# Allegro board POWER_BOARD_03AUG15_2330.brd
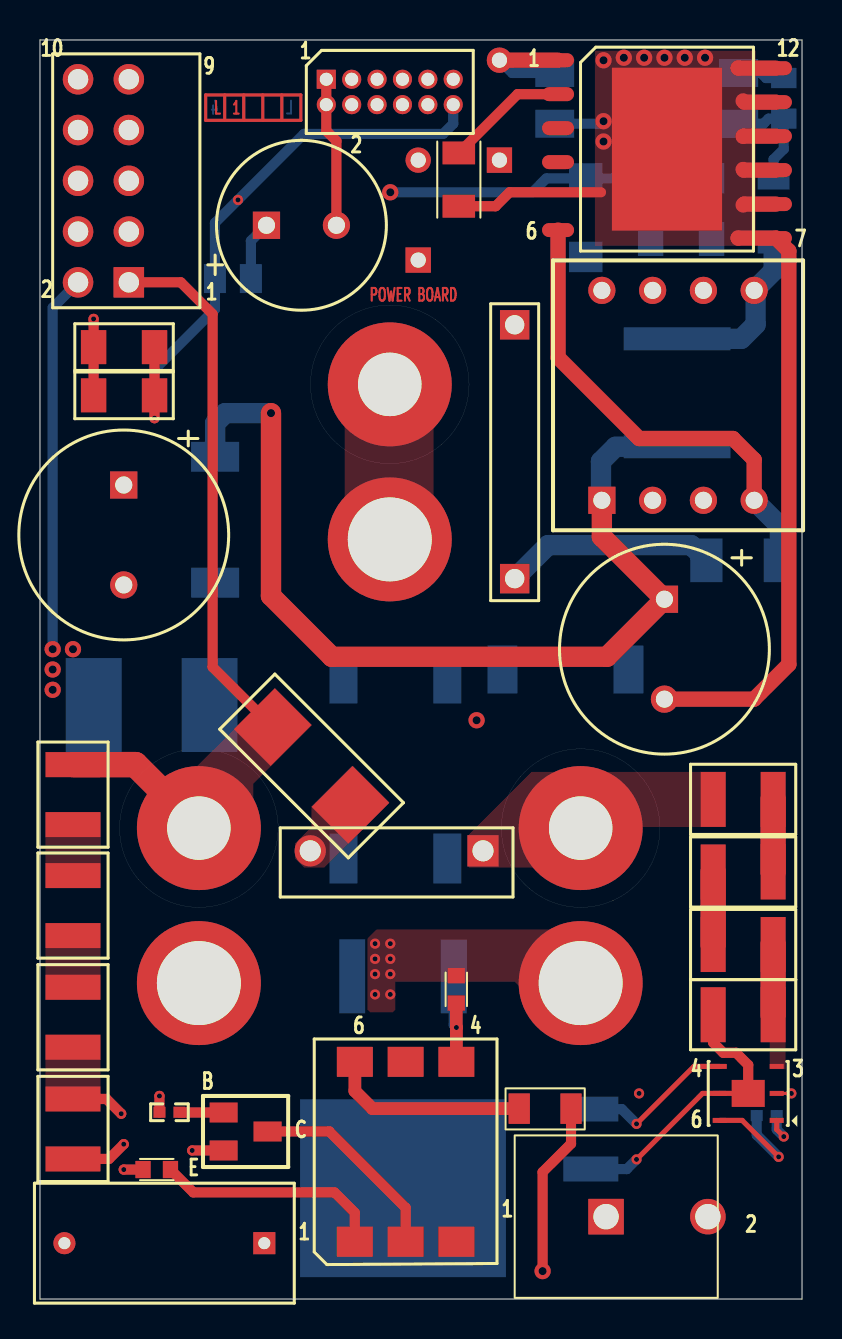
[diagram p0: board, top side]
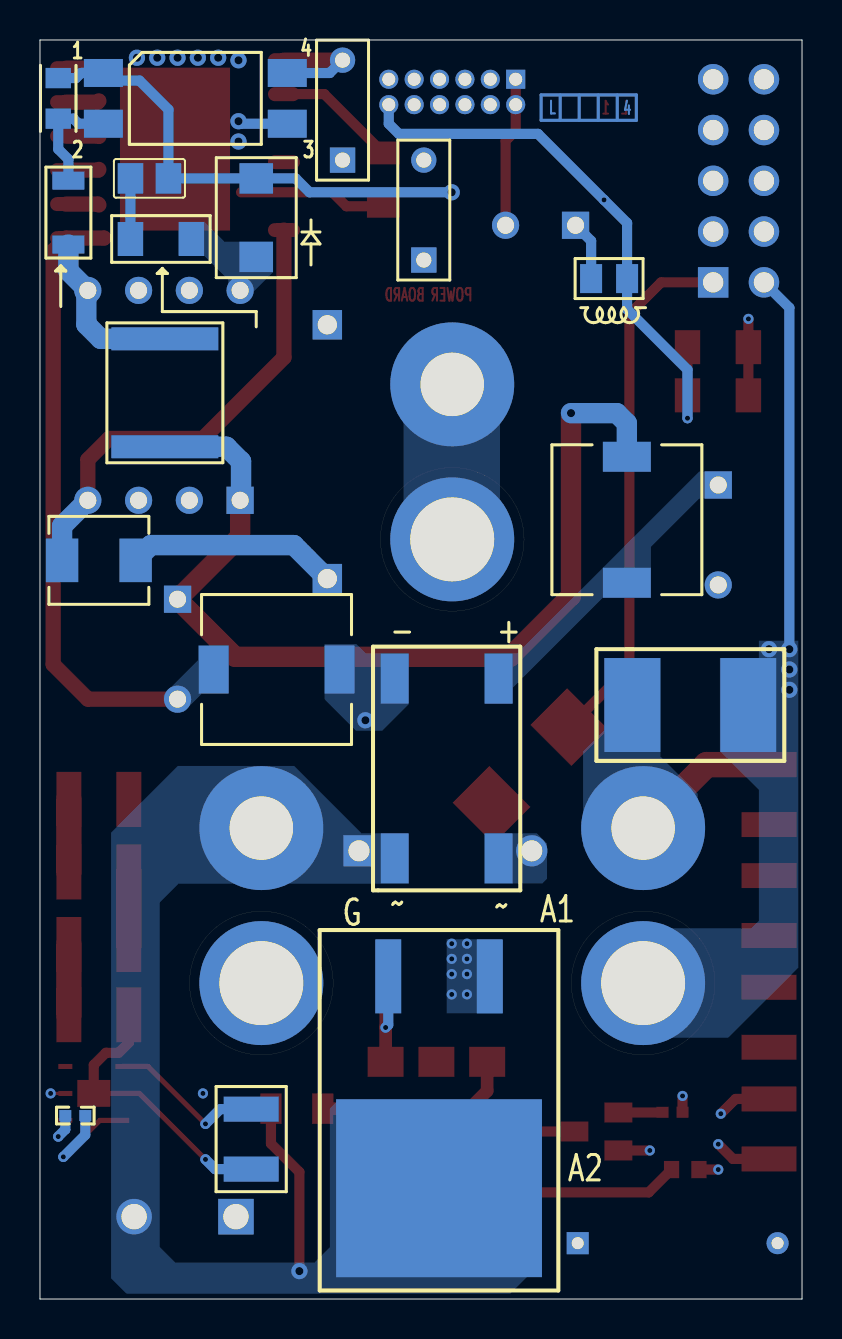
[diagram p1: board, bottom side, seen from below]

Outline 38.12 x 62.99 mm; copper layers: TOP, L02_SIG1, L03_SIG2, BOTTOM. Coordinates in mm from the lower left corner of the outline.
Outline path: 0,62.99 38.12,62.99 38.12,0 0,0 0,62.99

## Design rules (mm)
net group 50OHMS: nets N196502 N196542 N197144 N197248 TRIAC_CTRL
net group POWER: nets N196562

## Placement (name value [footprint] x y rotation side)
C8  10 uF 16V  [C1206]  20.95 56.01 270 top
C9  2.2 nF 250 VAC  [CC_2220_IPC-B]  31.88 45.34 90 bottom
C10  560 PF 50V  [C0805]  32.65 56.07 180 bottom
C11  0.01 uF  [B32021A3103M289]  11.22 2.79 180 top
C14  4.7 uF 450 V  [CAP_ELEC_RAD_EEU-EE2W100U]  4.19 40.73 270 top
C15  4.7 uF 450V  [CAP_ELEC_RAD_EEU-EE2W100U]  31.24 35.01 270 top
C16  470uF 10 V  [CAP_ELEC_RAD_EEU-FM1A102L]  11.33 53.72 0 top
C17  10 uF 10V  [1206]  4.21 45.21 180 top
C18  10 uF 10V  [1206]  4.21 47.62 180 top
D1  DF1508S  [DIODE_DF1504S]  17.78 26.54 180 bottom
D2  P6KE110A  [DO_204_P6KE110A]  23.75 48.74 270 top
D5  STTH1R06U  [SMB_STTH1R06U]  35.18 36.96 180 bottom
D6  ES1AL  [DO_214C]  27.3 54.1 90 bottom
J2  HEADER 10  [CONN10P_68015_210HLF_5X2]  4.44 50.87 90 top
L1  1mH  LQM21PN3R3NGRD  [IND_SRR0745A-102M]  8.76 38.99 90 bottom
L2  1mH  LQM21PN3R3NGRD  [IND_SRR0745A-102M]  26.29 31.5 0 bottom
L3  3.3 uH  [IND_LQM21PN3R3NGRD]  9.65 51.05 180 bottom
NOREF  -  []  0 0 0 top
NOREF#2  -  []  38.12 0 90 top
P1  20021311  [CONN20PIN_20021311]  14.33 61.03 0 top
Q1  FOD4208  [SOIC_0006_0889X0660_0254]  18.29 7.37 90 top
Q3  BTA12-800CW  [D2PAK]  18.16 8.79 0 bottom
Q5  NPN BCE  [SOT23]  10.29 8.38 0 top
R19  10 ohm 2W  [R2616]  13.59 26.67 135 top
R20  330  [R0603]  20.83 15.49 270 top
R21  1K  [RES_50D_200P_TH_VERTICAL]  28.32 4.12 0 top
R24  2.4M  [MBA02040C2404FC100]  18.92 54.48 90 bottom
R25  2.4M  [MBA02040C2404FC100]  22.99 59.48 90 bottom
R26  100 Ohm  [R0805]  37.21 60.07 270 bottom
R27  18 Ohm  [1206]  32.07 53.04 0 bottom
R28  200K  [R1210]  1.65 14.1 90 top
R29  200K  [R1210]  1.65 19.68 90 top
R30  10K  [R0402]  6.48 9.33 180 top
R31  360  [R1206]  25.27 9.52 0 top
R32  330  [R0603]  5.84 6.48 0 top
R33  200K  [R1210]  35.18 17.74 180 top
R34  200K  [R1210]  35.18 21.37 0 top
R35  100K  [R1210]  1.65 8.51 90 top
R36  100K  [R1210]  35.18 14.22 0 top
R37  100K  [R1210]  27.56 8 270 bottom
R38  10K  [R0402]  36.36 9.19 180 bottom
R39  200K  [R1210]  1.65 25.24 90 top
R40  200K  [R1210]  35.18 25 180 top
R41  0.004  [R2816]  5.59 29.72 180 bottom
RV1  B72207S2321K101  [2PIN_TH_MOV]  22.17 22.42 180 top
T2  TRANSFORMER  [TFMR_H12_5W13_5]  28.11 39.96 90 top
U1  MH  [MTG_PTH_NT_125DX325RD]  17.5 45.76 0 top
U4  MH  [MTG_PTH_NT_125DX325RD]  7.95 23.56 0 top
U5  MH  [MTG_PTH_NT_125DX325RD]  27.05 23.56 0 top
U7  pmnet  [MTG_PTH_NT_166DX244RD_PMNET]  17.5 38.01 180 bottom
U8  pmnet  [MTG_PTH_NT_166DX244RD_PMNET]  27.05 15.81 180 bottom
U9  pmnet  [MTG_PTH_NT_166DX244RD_PMNET]  7.95 15.81 180 bottom
U11  LTV-817S  [LTV-817S_SMD]  30.35 60.07 180 bottom
U12  TNY284KG  [SOIC_TNY284]  31.37 57.53 0 top
U13  LT6000CDCB  [SON6P_LT6000]  35.43 10.29 180 top
VR2  BZX79B2V4  [SOD80C_SMD]  36.7 54.36 90 bottom

## Library data of the parts
C8-C10 = CAPACITOR: alternate symbols: (CAPC1005X60L,CAPC1005X60M)
C11 = CAPACITOR NON-POL
C14-C18 = CAPACITOR
D1 = BRIDGE_RECTIFIER_0: Tolerance: TOLERANCE; User Part Number: PART_NO
D2 = DIODE TVS
D5 = DIODE
D6 = DIODE SCHOTTKY
J2 = HEADER 10
L1-L3 = INDUCTOR
P1 = CONN RCPT 10x2_0
Q1 = TRIAC DRIVER_0: User Part Number: PART_NO; Tolerance: TOLERANCE
Q3 = TRIAC_1
Q5 = NPN BCE_0: User Part Number: PART_NO; Tolerance: TOLERANCE
R19-R21 R24-R41 = RESISTOR
RV1 = MOV_0
T2 = TRANSFORMER_1
U1 U4 U5 = MH_0
U7-U9 = pmnet
U11 = LTV-817S
U12 = TNY284KG_1
U13 = LT6000
VR2 = DIODE BREAKDOWN

## Footprints (pads in the part's own frame, mm; a bottom-side part is the same pattern mirrored in y, then rotated)
2PIN_TH_MOV
  rect 1.562x1.562 hole 1.054: 1(0,0)
  round 1.562 hole 1.054: 2(8.643,0)
1206
  rect 1.27x1.702 smd: 1(-1.524,0) 2(1.524,0)
B32021A3103M289
  rect 1.105x1.105 hole 0.6: 1(0,0)
  round 1.105 hole 0.6: 2(10,0)
C0805
  rect 1.27x1.524 smd: 1(-0.95,0) 2(0.95,0)
C1206
  rect 1.143x1.626 smd: 1(-1.333,0) 2(1.333,0)
CAP_ELEC_RAD_EEU-EE2W100U
  rect 1.362x1.362 hole 0.854: 1(0,0)
  round 1.362 hole 0.854: 2(5,0)
CAP_ELEC_RAD_EEU-FM1A102L
  rect 1.362x1.362 hole 0.854: 1(0,0)
  round 1.362 hole 0.854: 2(3.5,0)
CC_2220_IPC-B
  rect 1.15x5.35 smd: 1(-2.7,0) 2(2.7,0)
CONN10P_68015_210HLF_5X2
  rect 1.524x1.524 hole 1.016: 1(0,0)
  round 1.524 hole 1.016: 2(0,2.54) 3(2.54,0) 4(2.54,2.54) 5(5.08,0) 6(5.08,2.54) 7(7.62,0) 8(7.62,2.54) 9(10.16,0) 10(10.16,2.54)
CONN20PIN_20021311
  rect 0.955x0.955 hole 0.65: 1(0,0)
  round 0.955 hole 0.65: 2(0,-1.27) 3(1.27,0) 4(1.27,-1.27) 5(2.54,0) 6(2.54,-1.27) 7(3.81,0) 8(3.81,-1.27) 9(5.08,0) 10(5.08,-1.27) 11(6.35,0) 12(6.35,-1.27)
D2PAK
  rect 1.3x3.7 smd: A1(-2.54,-7.35) G(2.54,-7.35)
  rect 10.3x8.9 smd: A2(0,3.25)
DIODE_DF1504S
  rect 1.4x2.5 smd: 1(2.6,4.5) 2(2.6,-4.5) 3(-2.6,4.5) 4(-2.6,-4.5)
DO_204_P6KE110A
  rect 1.472x1.472 hole 0.964: 1(0,0) 2(12.7,0)
DO_214C
  rect 1.52x1.68 smd: 1(-1.965,0) 2(1.965,0)
IND_LQM21PN3R3NGRD
  rect 1.1x1.45 smd: 1(-0.9,0) 2(0.9,0)
IND_SRR0745A-102M
  rect 1.5x2.4 smd: 1(-3.15,0) 2(3.15,0)
LTV-817S_SMD
  rect 1.95x1.4 smd: 1(-4.6,1.27) 2(-4.6,-1.27) 3(4.6,-1.27) 4(4.6,1.27)
MBA02040C2404FC100
  rect 1.266x1.266 hole 0.758: 1(-2.5,0)
  round 1.266 hole 0.758: 2(2.5,0)
MTG_PTH_NT_125DX325RD
  round 6.2 hole 3.175: 1(0,0)
MTG_PTH_NT_166DX244RD_PMNET
  round 6.2 hole 4.2: 1(0,0)
R0402
  rect 0.599x0.551 smd: 1(-0.5,0) 2(0.5,0)
R0603
  rect 0.762x0.864 smd: 1(-0.686,0) 2(0.686,0)
R0805
  rect 1.016x1.27 smd: 1(-1.016,0) 2(1.016,0)
R1206
  rect 1.067x1.524 smd: 1(-1.295,0) 2(1.295,0)
R1210
  rect 1.25x2.75 smd: 1(-1.5,0) 2(1.5,0)
R2616
  rect 2.6x2.9 smd: 1(-2.75,0) 2(2.75,0)
R2816
  rect 2.8x4.7 smd: 1(-2.9,0) 2(2.9,0)
RES_50D_200P_TH_VERTICAL
  rect 1.778x1.778 hole 1.27: 1(0,0)
  round 1.778 hole 1.27: 2(5.095,0)
SMB_STTH1R06U
  rect 1.62x2.18 smd: 1(-1.84,0) 2(1.84,0)
SOD80C_SMD
  rect 0.9x1.6 smd: 1(-1.6,0) 2(1.6,0)
SOIC_0006_0889X0660_0254
  rect 1.5x1.8 smd: 1(-4.5,2.54) 2(-4.5,0) 3(-4.5,-2.54) 4(4.5,-2.54) 5(4.5,0) 6(4.5,2.54)
SOIC_TNY284
  oval 1.6x0.7 smd: 1(-5.45,4.45) 2(-5.45,2.75) 3(-5.45,1.05) 4(-5.45,-0.65) 6(-5.45,-4.05) 7(5.45,-4.45) 8(5.45,-2.75) 9(5.45,-1.05) 10(5.45,0.65) 11(5.45,2.35) 12(5.45,4.05)
  rect 5.51x8.15 smd: 13(0,0)
SON6P_LT6000
  rect 0.7x0.25 smd: 1(-1.425,1.35) 2(-1.425,0) 3(-1.425,-1.35) 4(1.425,-1.35) 5(1.425,0) 6(1.425,1.35)
  rect 1.65x1.35 smd: 7(0,0)
SOT23
  rect 1.4x1.001 smd: B(-1.1,0.95) C(1.1,0) E(-1.1,-0.95)
TFMR_H12_5W13_5
  rect 1.362x1.362 hole 0.854: 1(0,0)
  round 1.362 hole 0.854: 2(0,-2.54) 3(0,-5.08) 4(0,-7.62) 5(10.503,-7.62) 6(10.503,-5.08) 7(10.503,-2.54) 8(10.503,0)

## Nets
GND: C8.2 C15.2 L2.2 U11.3(EMMITER) U12.7(S1) U12.8(S2) U12.9(S3) U12.10(S4) U12.11(S5) U12.12(S6) U12.13(GND)
GND_SIGNAL: C9.2 C16.2 C17.2 C18.2 J2.9 P1.1 P1.2(11) Q5.E R36.1 R37.2 T2.5 U13.5(V-) U13.7 VR2.1(ANODE)
VDD: C17.1 C18.1 J2.6 L3.2 P1.11(6) P1.12(16) R32.1 R38.2 U13.6(V+)
CURRENT_SENSE_RST: J2.10 P1.3(2)
NEUTRAL_IN: J2.1 R19.2 R39.2 R41.1 U4.1
NEUTRAL_OUT: J2.2 R41.2 U9.1
PHASE_IN: D1.4(AC_2) Q3.A2(T2) R21.2 R31.2 R40.2 RV1.1 U5.1
PHASE_TRIAC: C11.2 J2.3 Q3.A1(T1) R20.1 U8.1
SCL: J2.8 P1.4(12)
SDA: J2.7 P1.6(13)
TRIAC_CTRL: P1.10(15) R30.2
ZERO_CROSSING: R35.1 R37.1 U13.4(OUT)
N196502: Q1.2(CATHODE) Q5.C
N196542: Q1.6(ANODE1) R31.1
N196562: Q1.4(ANODE2) Q3.G R20.2
N197144: Q1.1(ANODE) R32.2
N197248: Q5.B R30.1
N6861231: U1.1 U7.1
N7004123: D1.2(AC_1) R19.1 RV1.2
N7004131: C14.1 D1.1(VC+) L1.1
N7004151: C14.2 D1.3(VC-) L2.1
N7004211: C9.1 C15.1 D2.1(ANODE) L1.2 R24.1 T2.1
N7004287: R24.2 R25.1
N7004295: D2.2(CATHODE) D5.2(K)
N7004335: D5.1(A) T2.4 U12.6(D)
N7004343: R25.2 U11.4(COLLECTOR) U12.1(EN/UV)
N7004351: C8.1 U12.2(BP/M)
N7004539: D6.1(ANODE) R27.1 T2.8
N7004543: C10.2 C16.1 D6.2(CATHODE) L3.1 R26.1 U11.1(ANODE)
N7004659: R26.2 U11.2(CATHODE) VR2.2(CATHODE)
N7004747: C10.1 R27.2
N7005304: C11.1 R21.1
N7005849: R38.1 U13.1(SHDN#)
N7005857: R28.1 R35.2 U13.2(IN-)
N7005865: R33.1 R36.2 U13.3(IN+)
N7005873: R33.2 R34.1
N7005877: R28.2 R29.1
N7006115: R34.2 R40.1
N7006121: R29.2 R39.1

Pads without a net: J2 4 5; P1 5 7 8 9; Q1 3 5; T2 2 3 6 7; U12 3 4

## Via types
v1: diameter 0.813, hole 0.406, TOP to BOTTOM, 16 vias
v2: diameter 0.508, hole 0.254, TOP to BOTTOM, 23 vias

## Routing (per net, layer and track width the routed paths; a pad name or vN(x,y) marks a point on that pad's centre or on a via; arc(x,y) is an arc through that point)
GND: length 48.9
  TOP w0.508: C8.2 22.8,54.67 23.49,55.37 28.07,55.37
  TOP w0.762: U12.11 35.24,59.88 35.18,59.94 ; 35.18,56.52 35.21,56.48 U12.9 ; 35.18,58.17 35.19,58.18 U12.10 ; 34.92,53.09 34.93,53.08 U12.7 37.47,52.43 37.47,31.75 35.73,30.01 C15.2 ; U12.8 35.22,54.78 35.18,54.74 ; U12.12 34.94,61.58 34.92,61.59
  BOTTOM w0.508: U11.3 28.07,58.8 v1(28.19,58.93)
  vias: v1(28.19,61.98) v1(28.19,57.91) v1(29.21,62.1) v1(30.23,62.1) v1(31.24,62.1) v1(32.26,62.1) v1(33.27,62.1)
GND_SIGNAL: length 174.3
  TOP w0.254: v2(29.84,6.98) 33.15,10.29 U13.5 U13.7
  TOP w0.508: v2(7.62,7.43) Q5.E ; C16.2 14.83,57.94 14.33,58.45 P1.2 P1.1 ; v2(2.68,49.04) C18.2 C17.2 ; U13.7 35.43,11.71 34.83,12.32 34.19,12.32 33.68,12.83 R36.1
  L02_SIG1 w0.508: J2.9 5.78,61.03 7.49,59.31 7.49,50.42 6.11,49.04 v2(2.68,49.04)
  L03_SIG2 w0.508: v2(7.62,7.43) 8.06,6.98 v2(29.84,6.98) 33.4,6.98 35.05,8.64 35.05,13.08 36.32,14.35 36.32,36.83 35.81,37.34 27.56,37.34 26.16,38.73 26.16,43.18 27.69,44.7 35.18,44.7 35.73,45.26 T2.5 34.05,52.15 24.18,52.15 22.61,53.72 C16.2 ; P1.1 J2.9
  BOTTOM w0.508: v2(29.84,6.98) 29.36,6.5 R37.2
  BOTTOM w1.016: C9.2 35.09,48.04 35.8,48.76 35.8,50.39 T2.5 36.7,51.44 VR2.1
VDD: length 148.1
  TOP w0.254: U13.6 35.13,8.94 v2(36.96,7.11)
  TOP w0.508: R32.1 v2(4.19,6.48) ; C18.1 C17.1 v2(5.73,44.07)
  L03_SIG2 w0.508: J2.6 3.17,57.22 6.03,57.22 8.25,54.99 v2(9.91,54.99) ; P1.12 P1.11 21.65,61.03 22.22,60.45 30.99,60.45 37.47,53.98 37.47,13.46 36.45,12.45 36.45,7.62 v2(36.96,7.11) 35.81,5.97 4.7,5.97 v2(4.19,6.48)
  BOTTOM w0.508: R38.2 35.86,8.21 v2(36.96,7.11) ; v2(5.73,44.07) 5.73,46.5 8.75,49.52 L3.2 8.75,53.84 v2(9.91,54.99) 13.21,58.29 20.17,58.29 20.68,58.8 P1.12
CURRENT_SENSE_RST: length 15.5
  L03_SIG2 w0.254: P1.3 15.6,62 15.11,62.48 3.36,62.48 J2.10
NEUTRAL_IN: length 34.4
  TOP w0.508: J2.1 7.05,50.87 8.64,49.28 8.64,31.62 R19.2
  TOP w1.27: R39.2 4.77,26.74 U4.1
NEUTRAL_OUT: length 18.9
  BOTTOM w0.508: 1.9,50.87 0.63,49.6 v1(0.63,32.51)
  vias: v1(0.63,31.5) v1(0.63,30.48) v1(1.65,32.51)
PHASE_IN: length 8.7
  TOP w0.508: R31.2 26.57,7.77 25.15,6.35 v1(25.15,1.4)
PHASE_TRIAC: length 42.8
  L03_SIG2 w1.016: J2.3 6.66,53.41 9.02,51.05 9.02,35.69 17.14,27.56 17.14,17.14
  vias: v2(16.76,17.78) v2(16.76,17.02) v2(16.76,16.26) v2(16.76,15.24) v2(17.53,17.78) v2(17.53,17.02) v2(17.53,16.26) v2(17.53,15.24)
SCL: length 15.8
  L03_SIG2 w0.254: J2.8 3.11,59.69 6.6,59.69 8,58.29 14.86,58.29 15.6,59.03 P1.4
SDA: length 14.3
  L03_SIG2 w0.254: J2.7 6.66,58.49 7.75,57.4 15.37,57.4 16.87,58.9 P1.6
TRIAC_CTRL: length 68.3
  TOP w0.508: v2(5.98,10.16) R30.2
  L02_SIG1 w0.508: P1.10 19.41,58.8 18.9,58.29 11.81,58.29 8.76,55.25 8.76,49.53 0.63,41.4 0.63,36.2 3.94,32.89 3.94,28.19 0.63,24.89 0.63,13.84 4.32,10.16 v2(5.98,10.16)
ZERO_CROSSING: length 36.9
  TOP w0.254: v2(29.84,8.76) 32.72,11.64 U13.4
  TOP w0.508: v2(4.19,7.75) 3.45,7.01 R35.1
  L03_SIG2 w0.508: v2(4.19,7.75) 4.64,8.19 29.28,8.19 v2(29.84,8.76)
  BOTTOM w0.508: v2(29.84,8.76) 29.11,9.5 R37.1
N196502: length 10.2
  TOP w0.508: Q1.2 18.29,4.57 14.48,8.38 Q5.C
N196542: length 10
  TOP w0.635: Q1.6 15.75,10.41 16.64,9.52 R31.1
N196562: length 5.6
  TOP w0.635: Q1.4 v2(20.83,13.58) 20.83,13.59 R20.2
  BOTTOM w0.508: v2(20.83,13.58) 20.7,13.72 Q3.G
N197144: length 11.6
  TOP w0.508: Q1.1 15.75,4.32 14.74,5.33 7.67,5.33 R32.2
N197248: length 2.2
  TOP w0.508: R30.1 Q5.B
N7004151: length 20.5
  L02_SIG1 w1.016: 4.19,35.73 8.98,35.73 15.75,28.96 v1(21.84,28.96)
N7004211: length 65
  TOP w1.016: v1(11.56,44.32) 11.56,35.18 14.61,32.13 28.36,32.13 C15.1 28.11,38.14 T2.1
  L02_SIG1 w1.016: T2.1 28.11,44.38 D2.1 20.51,51.98 R24.1
  BOTTOM w1.016: T2.1 28.07,40.01 28.07,41.91 28.8,42.64 C9.1 ; L1.2 8.76,43.81 9.27,44.32 v1(11.56,44.32)
N7004287: length 4.1
  L03_SIG2 w0.762: R24.2 R25.1
N7004295: length 10.6
  BOTTOM w1.016: D5.2 32.58,37.72 25.43,37.72 D2.2
N7004335: length 23.9
  TOP w0.762: T2.4 35.73,41.99 34.67,43.05 29.97,43.05 25.92,47.11 U12.6
  BOTTOM w1.016: D5.1 37.02,38.67 T2.4
N7004343: length 6
  TOP w0.508: R25.2 23.11,61.98
  TOP w0.762: 23.11,61.98 U12.1
  BOTTOM w0.508: R25.2 23.63,61.34 U11.4
N7004351: length 6.2
  TOP w0.508: U12.2 23.9,60.28 C8.1
N7004543: length 34.1
  L02_SIG1 w0.508: v1(17.53,55.37) 12.98,55.37 C16.1
  BOTTOM w0.508: R26.1 36.32,61.09 36.07,61.34 U11.1 34.57,60.96 33.15,60.96 31.7,59.51 C10.2 D6.2 25.33,56.07 24.64,55.37 v1(17.53,55.37) ; L3.1 10.55,52.94 C16.1
N7004659: length 5.7
  BOTTOM w0.508: VR2.2 36.7,57.02 37.21,57.53 R26.2 36.45,59.05 36.2,58.8 U11.2
N7004747: length 3
  BOTTOM w0.508: R27.2 C10.1
N7005304: length 17.6
  L02_SIG1 w1.016: C11.1 12.55,4.12 R21.1
N7005849: length 2.2
  TOP w0.254: v2(37.21,8.13) 36.86,8.48 U13.1
  BOTTOM w0.508: v2(37.21,8.13) 36.86,8.48 R38.1
N7005857: length 37.4
  TOP w0.152: U13.2 v2(37.59,10.29)
  TOP w0.508: R35.2 3.33,10.01 v2(4.06,9.27)
  L02_SIG1 w0.508: v2(29.97,10.29) v2(37.59,10.29)
  L03_SIG2 w0.508: v2(29.97,10.29) 28.96,9.27 v2(4.06,9.27)
N7005865: length 3.5
  TOP w1.27: R33.1 R36.2
N7005873: length 3.6
  TOP w1.27: R34.1 R33.2
N7006115: length 3.6
  TOP w1.27: R40.1 R34.2

## Copper pours and planes (outline as drawn; the poured copper is in the pictures)
GND on TOP: 27.76,52.69 27.76,62.46 35.81,62.46 35.81,52.69
GND on BOTTOM: 28.69,32.7 28.69,30.29 30.02,30.29 30.95,29.37 31.37,29.37 31.93,29.93 31.93,30.25 30.19,31.99 30.19,32.7
GND on L02_SIG1: 27.76,52.37 27.76,62.46 37.89,62.46 37.89,52.37
NEUTRAL_IN on TOP: 10.67,24.58 6.42,21.09 7.65,26.45 11.76,30.55 13.6,28.71 10.67,25.78
NEUTRAL_IN on BOTTOM: 9.91,32.06 9.91,28.44 10.95,27.39 10.95,22.64 8.99,20.67 6.89,20.67 5.22,22.34 5.22,25.28 7.08,27.14 7.08,32.06
NEUTRAL_OUT on TOP: 4.96,15.81 10.94,15.81
NEUTRAL_OUT on BOTTOM: 5.11,15.81 10.79,15.81
NEUTRAL_OUT on BOTTOM: 9.27,13.08 3.69,13.08 0.18,16.58 0.18,32.93 2.16,32.93 2.16,32.07 4.11,32.07 4.11,27.43 2.16,25.48 2.16,18.92 2.54,18.54 9.02,18.54 10.54,17.02 10.54,14.35
NEUTRAL_OUT on L03_SIG2: 9.27,13.08 3.69,13.08 0.18,16.58 0.18,32.93 2.16,32.93 2.16,18.92 2.54,18.54 9.02,18.54 10.54,17.02 10.54,14.35
PHASE_IN on TOP: 29.75,23.62 28.15,21.1 25.21,21.59 21.46,21.59 21.46,23.24 24.59,26.37 34.3,26.37 34.3,23.62
PHASE_IN on BOTTOM: 31.23,26.67 34.57,23.34 34.57,1.04 33.79,0.26 14.6,0.26 13.46,1.4 13.46,9.91 23.24,9.91 23.62,9.52 23.62,2.6 24.4,1.82 31.36,1.82 32.13,2.6 32.13,19.84 31.19,20.78 19.68,20.78 19.68,23.3 22.03,23.3 25.4,26.67
PHASE_TRIAC on TOP: 25.91,18.49 29.57,14.34 24.15,15.47 23.75,15.88 17.78,15.88 17.78,14.48 17.65,14.35 16.51,14.35 16.38,14.48 16.38,18.03 16.84,18.49
PHASE_TRIAC on BOTTOM: 24.09,15.81 30.01,15.81
PHASE_TRIAC on BOTTOM: 14.97,17.99 17.78,17.99 17.78,14.29 14.97,14.29
PHASE_TRIAC on L02_SIG1: 0.63,2.24 0.63,3.36 4.71,3.36 16.38,15.04 16.38,18.49 25.91,18.49 29.57,14.34 24.15,15.47 23.75,15.88 17.78,15.88 17.78,14.48 17.65,14.35 17.18,14.35 5.07,2.24
PHASE_TRIAC on L03_SIG2: 17.78,18.03 17.78,14.99 16.51,14.99 16.51,18.03
N6861231 on TOP: 15.24,47.24 19.68,47.24 19.68,36.07 15.24,36.07
N6861231 on BOTTOM: 15.11,47.37 19.94,47.37 19.94,36.2 15.11,36.2
N7004123 on TOP: 12.76,22.79 12.76,22.05 13.22,21.59 14.22,21.59 15.89,23.26 15.89,23.24 17.47,24.82 15.61,26.68 13.58,24.65 13.58,23.62
N7004123 on BOTTOM: 15.88,23.29 15.88,20.79 12.99,20.79 12.76,21.02 12.76,22.79 13.26,23.29
N7004131 on BOTTOM: 14.47,30.58 9.97,35.09 7.56,35.09 7.56,37.63 5.15,40.05 3.51,40.05 3.51,41.41 5.14,41.41 14.25,32.29 15.88,32.29 15.88,29.77 14.47,29.77
N7004151 on BOTTOM: 19.68,32.29 21.82,32.29 22.29,32.77 23.89,32.77 23.89,30.01 22.31,28.43 21,28.43 19.68,29.75
N7004539 on BOTTOM: 31.19,53.9 29.89,53.9 28.89,52.9 26.47,52.9 26.47,51.37 28,49.84 28.37,49.84 28.7,50.16 28.7,50.99 29.9,52.18 31.19,52.18
N7005857 on TOP: 0.27,9.4 0.27,13.22 3.03,13.22 3.03,9.4
N7005865 on TOP: 37.3,11.5 37.3,15.58 36.51,15.58 36.51,11.5
N7005877 on TOP: 0.27,14.99 0.27,18.8 3.03,18.8 3.03,14.99
N7006121 on TOP: 0.27,20.57 0.27,24.36 3.04,24.36 3.04,20.57

## Text on the board
BOTTOM: 4 | L | L04_BOTTOM
Ref Des/Assembly Bottom: ASSEMBLY BOTTOM
Package Geometry/Pastemask Bottom: PASTEMASK BOTTOM
Ref Des/Silkscreen Bottom: SILKSCREEN BOTTOM
User.Comments: 6 | 4 | 3 | A2 | A1 | G | SOLDERMASK BOTTOM | SOLDERMASK TOP
TOP: L | 1 | POWER BOARD | L01_TOP
Ref Des/Assembly Top: B | E | C | ASSEMBLY TOP
Package Geometry/Pastemask Top: PASTEMASK TOP
Ref Des/Silkscreen Top: SILKSCREEN TOP
L02_SIG1: L | 2 | L02_SIG1
L03_SIG2: L | 3 | L03_SIG2
PAGE_OUTLINE: OUTLINE
TOLERANCE_BOTTOM: FAB_DRAWING
USER_PART_NUM_BOTTOM: STACKUP INFO | LAYER 1-TOP | LAYER 2 | LAYER 3 | LAYER 4-BOT | CORE | 62.992 MILS | (1.6 MM)
DEVICE_TYPE_BOTTOM: 10. IF VIA IN PAD (VIP) SHOULD BE FILLED AND PLATTED WITH PLANNER | NOTES: | 1. ALL ARTWORK PATTERNS ARE VIEWED FROM THE TOP. | 2. PLATING FINISH METHOD SHALL BE HASL | 3. SOLDER MASK OVER BARE COPPER (SMOBC) SHALL | 4. MASK COLOUR IS GREEN AND TYPE IS LPI | 5. BOARD THICKNESS IS 1.6 MM | 6. COPPER THICKNESS | 7. PCB MATERIAL IS FR4 | 8. STACKUP SPECIFICATIONS IS AS FOLLOWS | 9. SIGNAL TRACE WIDTH 6 MILS POWER TRACEWIDTH 30 MILS (MIN 20 MILS) | BE ON BOTH SIDES. | FOR OUTER LAYERS IS 35 MICRONS
TOLERANCE_TOP: 4 | 1 | C6 | R9 | R32 | C4 | Y1 | C2 | R17 | C11 | C5 | B | E | 2 | 3 | U2 | GND | R12 | VDD | C | R7 | 6 | C10 | P1 | 8 | 5 | 12 | U3 | 11 | C8 | C9 | R21 | R30 | U4 | 18 | 24 | Q5 | R3 | R4 | R5 | Q1 | R14 | R18 | U1 | ISO1 | R31 | U5 | R13 | R10 | C7 | R11 | C1 | C3 | R8 | R15 | R16 | R20 | R6 | R1 | R2 | ASSEMBLY TOP | DATE: 23/05/2015 | POWER BOARD
COMPVAL_TYPE_TOP: DATE: 03/08/2015 | POWER BOARD
User.13: FIGURE | SIZE | 10.0 | 16.0 | 23.62 | 25.59 | 29.84 | 33.62 | 37.95 | 40.0 | 41.5 | 50.0 | 125.0 | 165.35 | DRILL CHART: TOP to BOTTOM | ALL UNITS ARE IN MILS | TOLERANCE | +3.0/-3.0 | +0.0/-0.0 | PLATED | QTY | 23 | 16 | 2 | 12 | 4 | 14 | 10 | 3
